# Altium PCB Cirk ver2.PcbDoc
Units mil, origin at the board's own origin, x right, y up, seen from the top; angles counter-clockwise.
Board outline 6000 x 4000 mil, 2 copper layers (Top Layer, Bottom Layer); 13 components, 0 nets, 56 pads, 0 vias.
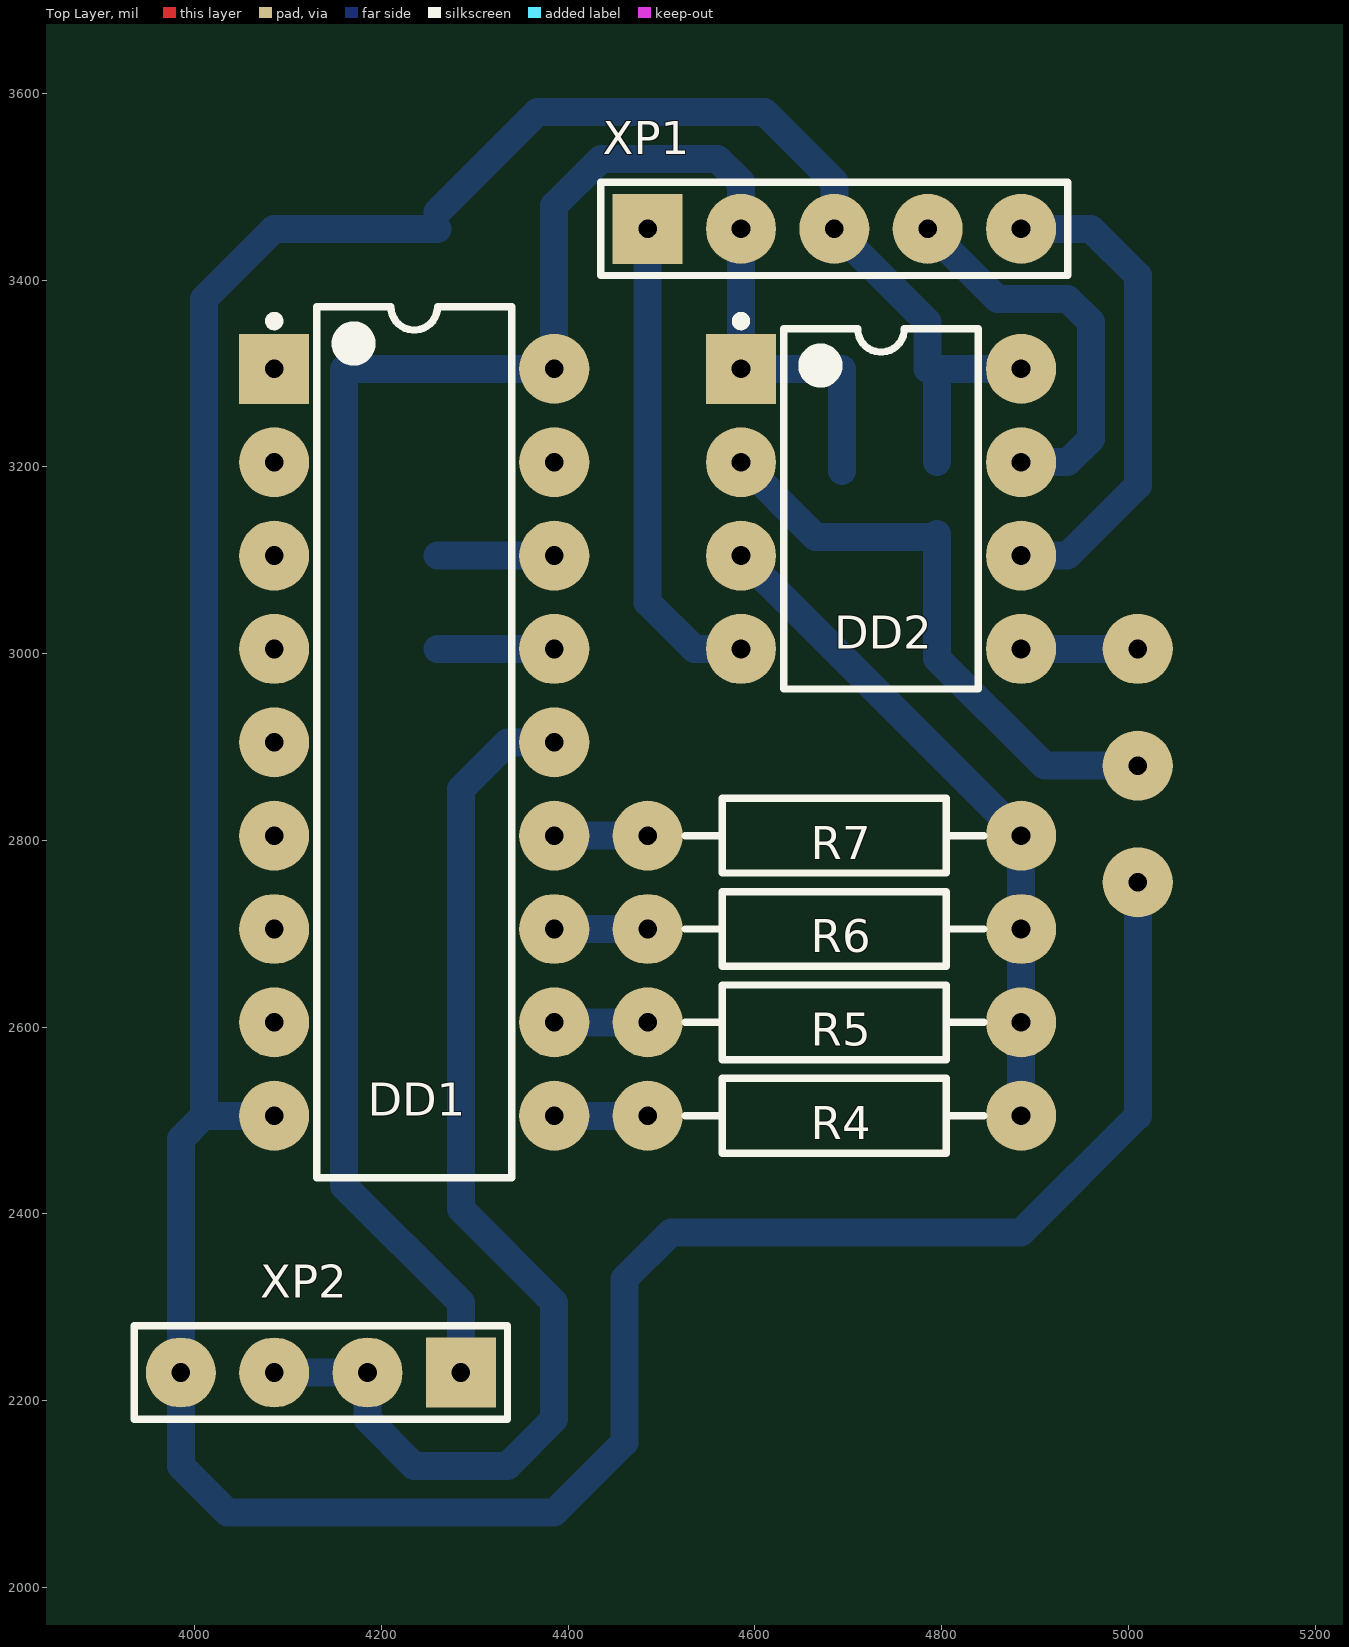
[diagram p0: Top Layer view]
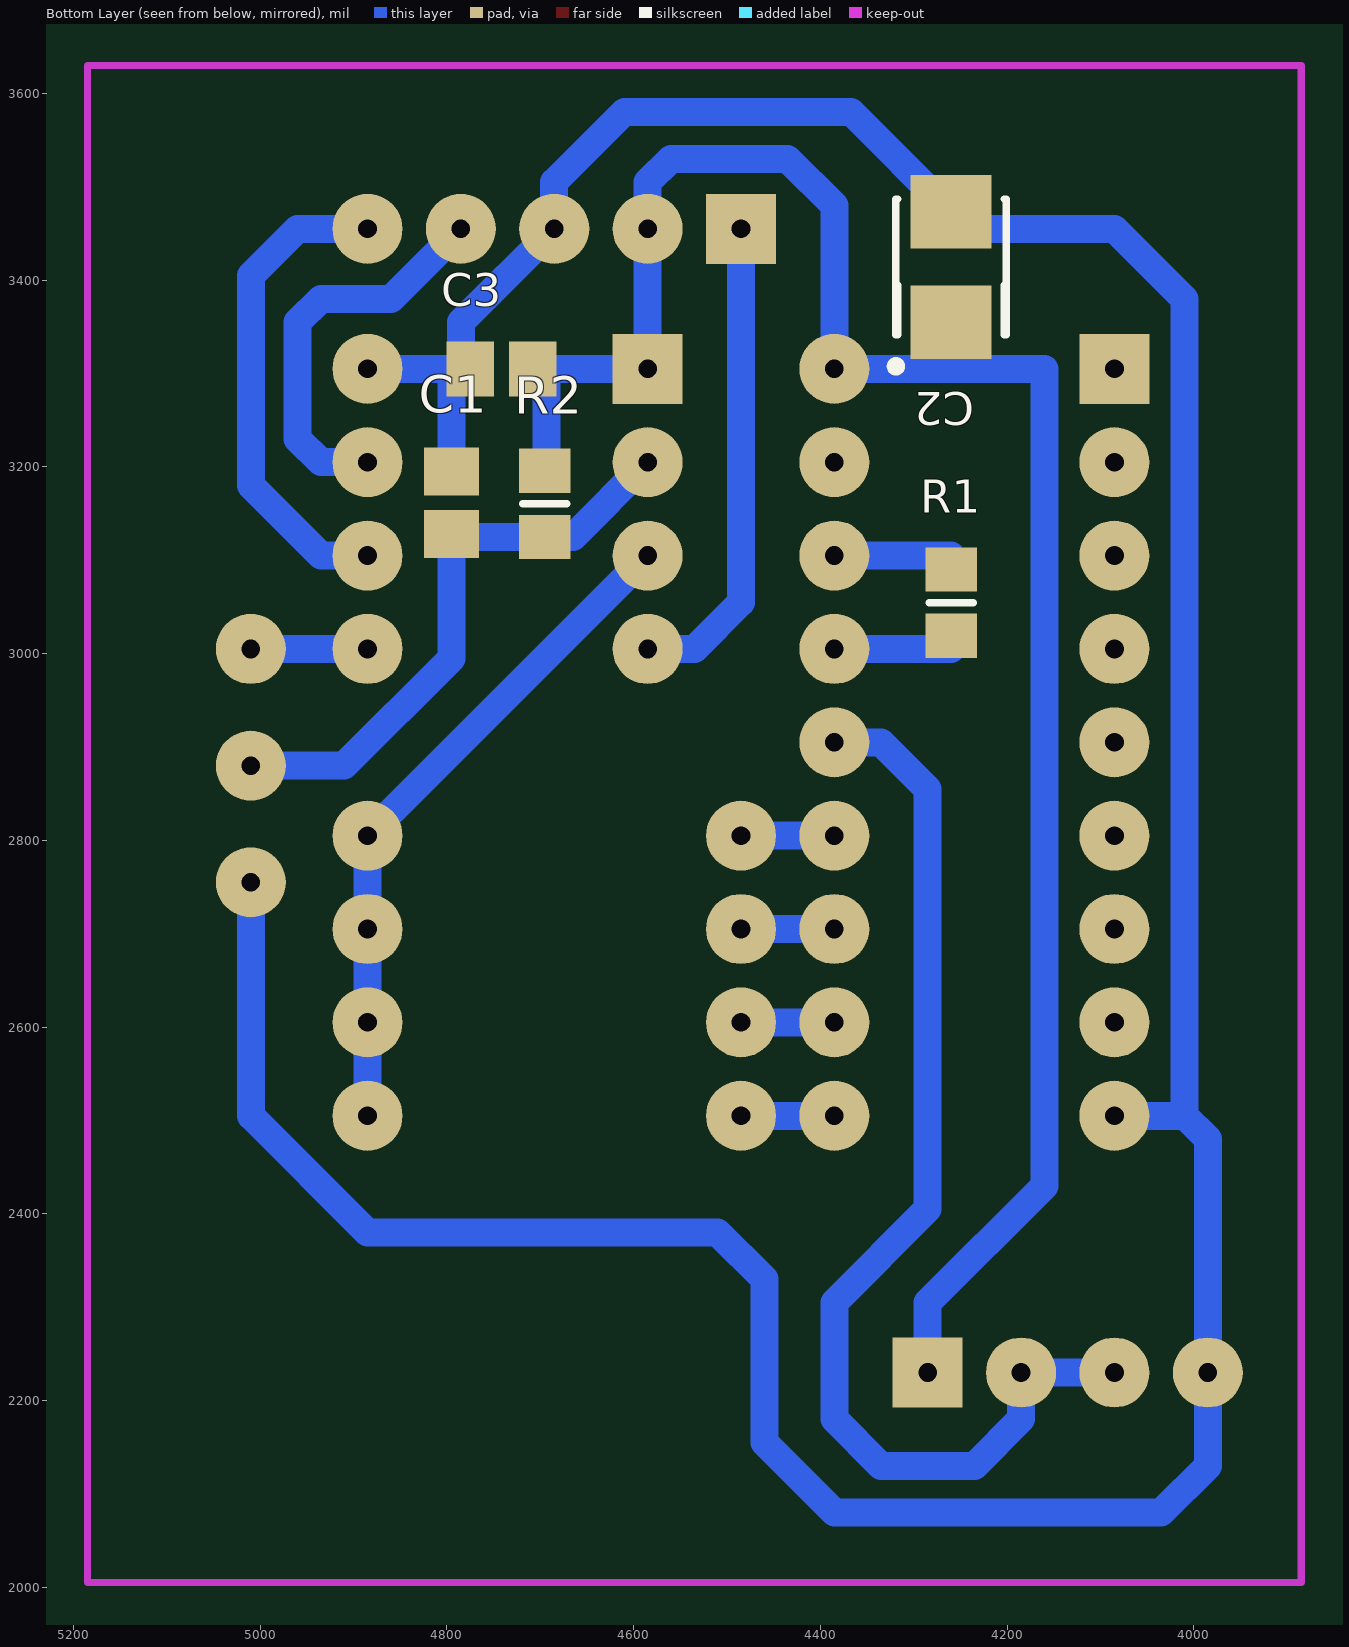
[diagram p1: Bottom Layer view, seen from below]

## Layer stack, top to bottom
Top Layer: signal copper 1.4
Dielectric: dielectric 12.6, FR-4, Dk 4.8
Bottom Layer: signal copper 1.4

## Board outline
1000,1000 7000,1000 7000,5000 1000,5000

## Design rules (kind name [scope] priority, off if disabled: settings)
Clearance [All] p1: gap=10
PolygonConnect [All] p1: connectstyle=Relief reliefconductorwidth=10 reliefentries=4 polygonreliefangle="90 Angle" airgapwidth=10
RoutingVias [All] p1: holewidth=28 width=50 viastyle="Through Hole" minholewidth=28 minwidth=50 maxholewidth=28 maxwidth=50
SolderMaskExpansion [All] p1: expansion=4
Width [All] p1: maxlimit=10 minlimit=10 preferedwidth=10
28 further rules are at their usual default settings.

## Components (designator, comment, footprint, x,y, rotation, side; value= is the part's Value field where it differs from the comment)
C1 "Cap" CAPC2012N 4795,3195 r270 bottom
C2 "Cap Pol1" TC3528-1411 4260,3355 r90 bottom
C3 "Cap" CAPC2012N 4775,3305 r180 bottom
DD1 "PT2272" DIP-18 4085,3305 r0 top
DD2 "PIC12F629-I/P" PDIP300-P8 4585,3305 r0 top
R1 "Res2" RESC2012N 4260,3090 r270 bottom
R2 "Res2" RESC2012N 4695,3125 r90 bottom
R4 "Res2" AXIAL-0.4 4485,2505 r0 top
R5 "Res2" AXIAL-0.4 4485,2605 r0 top
R6 "Res2" AXIAL-0.4 4485,2705 r0 top
R7 "Res2" AXIAL-0.4 4485,2805 r0 top
XP1 "ICSP" HDR1X5 4485,3455 r0 top
XP2 "Reciver" HDR1X4 4285,2230 r180 top

## Footprints (in the part's own frame and the unit in brackets; to place one, negate y for a bottom-side part, rotate by r counter-clockwise, add the part's x,y. Pads: shape width x height; smd on the part's side, far side on the other; paste and mask are expansions set on the pad)
AXIAL-0.4 [mil] "Axial Device, Thru-Hole; 2 Leads; 0.4 in Pin Spacing"
  round 75 hole 20: 1(0,0) 2(400,0)
  silkscreen extent 40,-40 360,40
CAPC2012N [mm] "Chip Capacitor, Body 2.0x1.3mm, IPC Medium Density"
  rect 1.3x1.5 smd: 1(0,0) 2(1.7,0)
  body extent -0.25,-0.72 1.95,0.72, height 1.1
DIP-18 [mil] "DIP; 18 Leads; Row Spacing 7.62 mm; Pitch 2.54 mm"
  rect 75x75 hole 20: 1(0,0)
  round 75 hole 20: 2(0,-100) 3(0,-200) 4(0,-300) 5(0,-400) 6(0,-500) 7(0,-600) 8(0,-700) 9(0,-800) 10(300,-800) 11(300,-700) 12(300,-600) 13(300,-500) 14(300,-400) 15(300,-300) 16(300,-200) 17(300,-100) 18(300,0)
  silkscreen extent -5,-867 254,67, body extent 8,-865 292,65, height 200
HDR1X4 [mil] "Connector; Header; 4 Position"
  rect 75x75 hole 20: 1(0,0)
  round 75 hole 20: 2(100,0) 3(200,0) 4(300,0)
  silkscreen extent -50,-50 350,50
HDR1X5 [mil] "Connector; Header; 5 Position"
  rect 75x75 hole 20: 1(0,0)
  round 75 hole 20: 2(100,0) 3(200,0) 4(300,0) 5(400,0)
  silkscreen extent -50,-50 450,50
PDIP300-P8 [mil] "DIP, 8-Leads, Row Spacing 7.62mm, Pitch 2.54mm, Body 9.5x6.6mm"
  rect 75x75 hole 20: 1(0,0)
  round 75 hole 20: 2(0,-100) 3(0,-200) 4(0,-300) 5(300,-300) 6(300,-200) 7(300,-100) 8(300,0)
  silkscreen extent -5,-343 254,56, body extent 10,-343 290,43, height 210
RESC2012N [mm] "Chip Resistor, Body 2.0x1.3mm, IPC Medium Density"
  rect 1.2x1.4 smd: 1(0,0) 2(1.8,0)
  silkscreen extent 0.9,-0.6 0.9,0.6, body extent -0.18,-0.7 1.97,0.7, height 0.65
TC3528-1411 [mm] "Capacitor, SM Tantalum; Body 3.5 x 2.8 mm (LxW typ)"
  rect 2x2.2 smd: 1(0,0) 2(3,0)
  silkscreen extent -1.32,-1.5 3.35,1.63

## Part data
C1 C3: "Capacitor"
C2: "Polarized Capacitor (Radial)"
DD2: "FLASH-Based 8-Bit CMOS Microcontroller, 8-Pin PDIP, Industrial Temperature"
R1 R2 R4 R5 R6 R7: "Resistor"
XP1: library part "Header 5H", "Header, 5-Pin, Right Angle"
XP2: library part "Header 4", "Header, 4-Pin"

## Free pads (board coordinates)
  round 75 hole 20: 1(5010,3005) 2(5010,2755) 2(5010,2880)

## Nets (pads, with @x,y where several pads share a name; then routed paths per layer and width w, separated by ;. In a path a pad name is that pad's centre, name@x,y a point inside that pad or via, vN(x,y) a via of type N, cw(c..) or ccw(c..) an arc to the next point about the centre after c; other vN are vias at no path point)
pads on no net: C1.1 C1.2 C2.1 C2.2 C3.1 C3.2 DD1.1 DD1.2 DD1.3 DD1.4 DD1.5 DD1.6 DD1.7 DD1.8 DD1.9 DD1.10 DD1.11 DD1.12 DD1.13 DD1.14 DD1.15 DD1.16 DD1.17 DD1.18 DD2.1 DD2.2 DD2.3 DD2.4 DD2.5 DD2.6 DD2.7 DD2.8 R1.1 R1.2 R2.1 R2.2 R4.1 R4.2 R5.1 R5.2 R6.1 R6.2 R7.1 R7.2 XP1.1 XP1.2 XP1.3 XP1.4 XP1.5 XP2.1 XP2.2 XP2.3 XP2.4
copper on no net: | length 11135.3
  Bottom Layer w30: 4085,2230 4185,2230 4185,2180 4235,2130 4335,2130 4385,2180 4385,2305 4285,2405 4285,2855 4335,2905 4385,2905 ; 4085,2505 4010,2505 ; 4260,3005 4385,3005 ; 4260,3105 4385,3105 ; 4260,3455 4085,3455 4010,3380 4010,2505 ; 4260,3473.11 4366.89,3580 4610,3580 4685,3505 4685,3455 4785,3355 4785,3305 4795,3305 ; 4285,2230 4285,2305 4160,2430 4160,3305 4385,3305 4385,3480 4435,3530 4560,3530 4585,3505 4585,3305 4693.07,3305 4693.07,3195.87 ; 4385,2505 4485,2505 ; 4385,2605 4485,2605 ; 4385,2705 4485,2705 ; 4385,2805 4485,2805 ; 4485,3455 4485,3055 4535,3005 4585,3005 ; 4585,3105 4885,2805 4885,2705 4885,2605 4885,2505 ; 4585,3205 4665,3125 4695,3125 4781.93,3125 ; 4785,3455 4860,3380 4935,3380 4960,3355 4960,3230 4935,3205 4885,3205 ; 4795,3128.07 4795,2995 4910,2880 5010,2880 ; 4795,3205 4795,3305 ; 4885,3005 5010,3005 ; 4885,3105 4935,3105 5010,3180 5010,3405 4960,3455 4885,3455 ; 4885,3305 4795,3305 ; 5010,2755 5010,2505 4885,2380 4510,2380 4460,2330 4460,2155 4385,2080 4035,2080 3985,2130 3985,2230 3985,2480 4010,2505

## Keep-outs
Bottom Layer:
  lines w7.87: 3885,2005 3885,3630 5185,3630 5185,2005 3885,2005

## Dimensions
3885,3630 to 5185,3630 on Bottom Overlay
3885,3630 to 3885,2005 on Bottom Overlay